# Altium PCB PCB.PcbDoc
Units mil, origin at the board's own origin, x right, y up, seen from the top; angles counter-clockwise.
Board outline 6000 x 4000 mil, 2 copper layers (Top Layer, Bottom Layer); 13 components, 8 nets, 42 pads, 0 vias.
Unrouted connection lines stored in the file: 27.
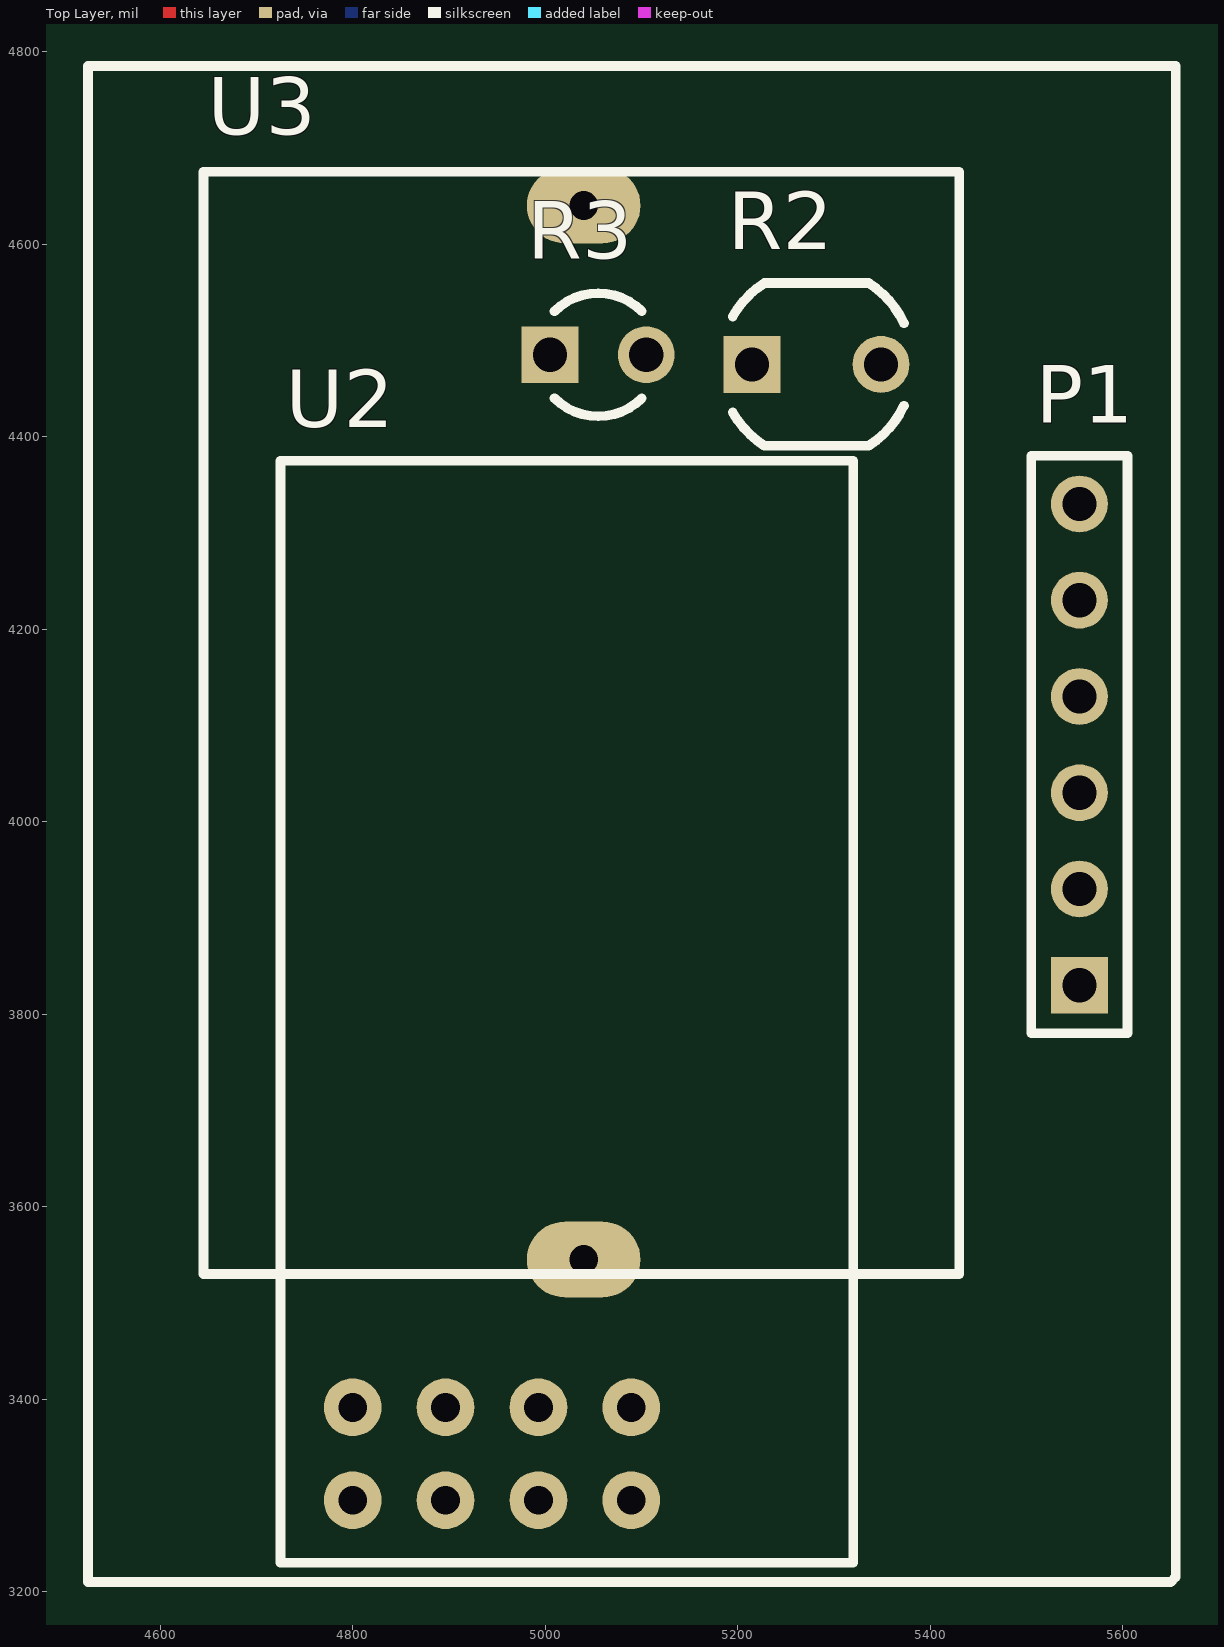
[diagram p0: Top Layer view]
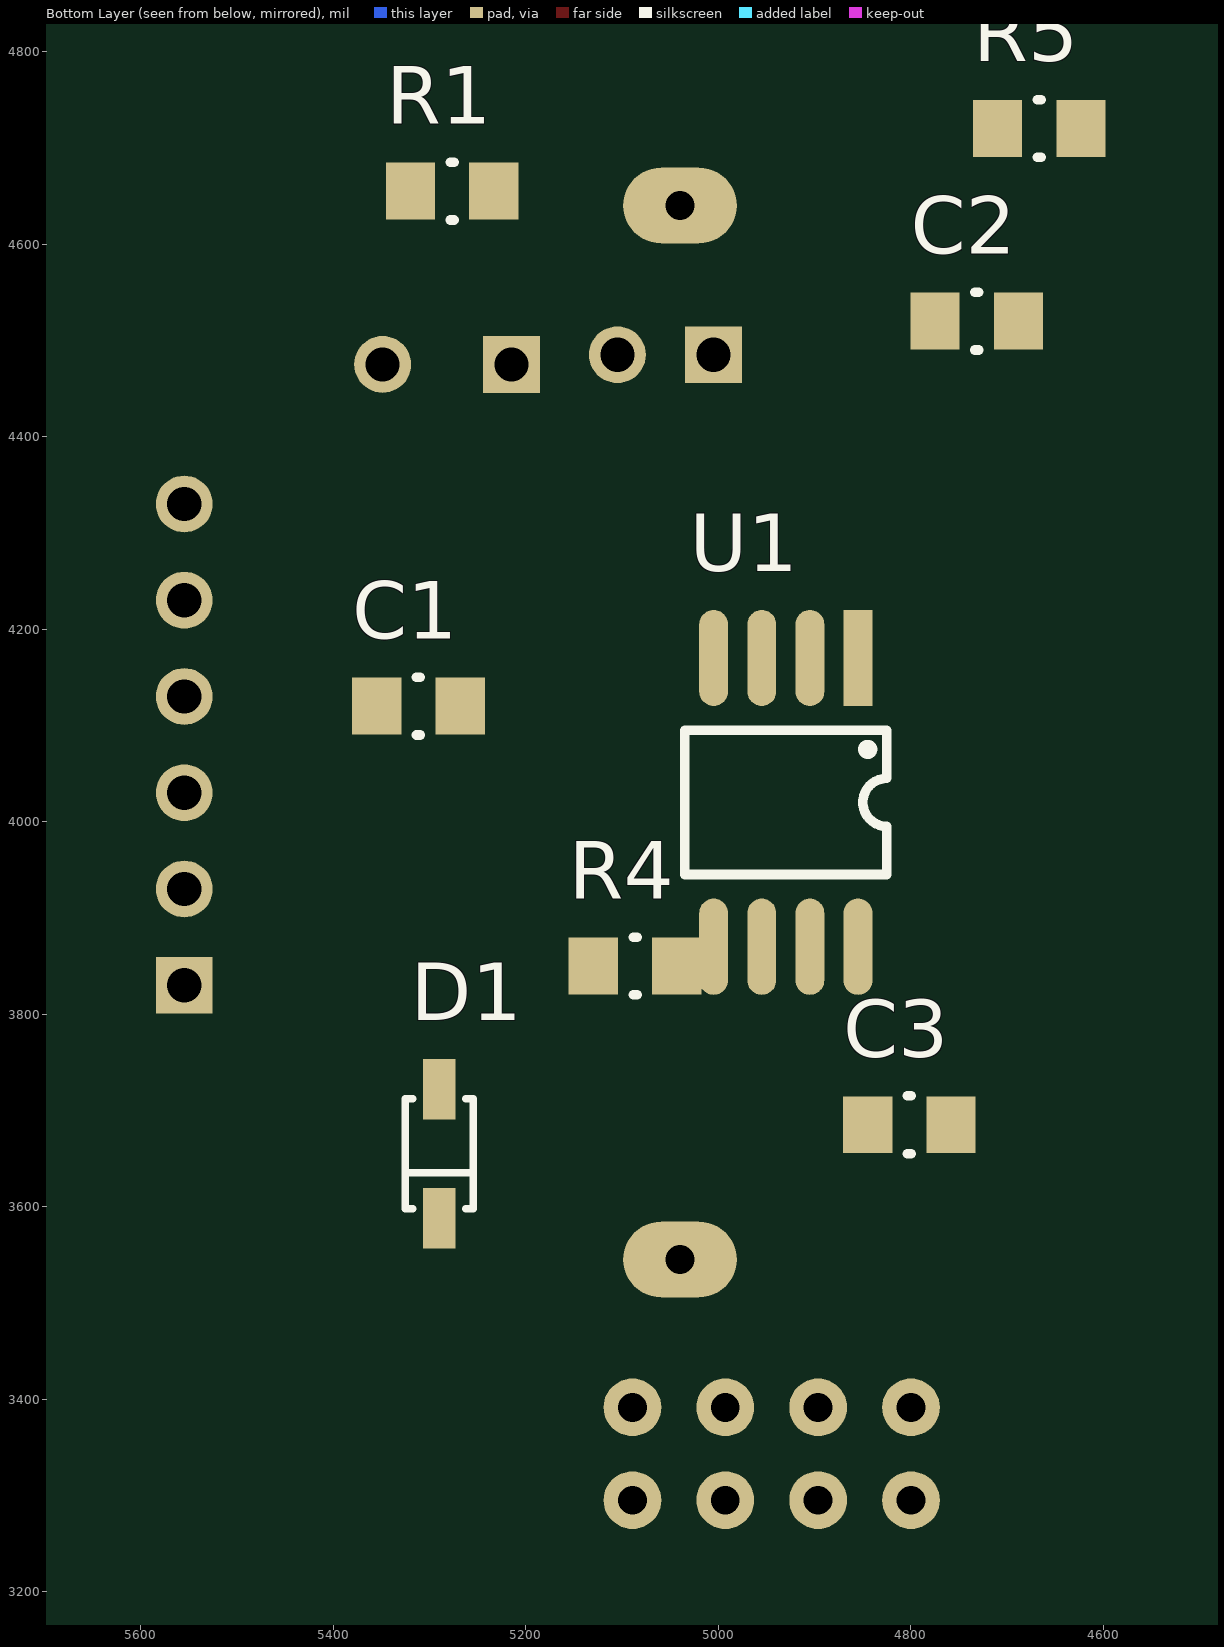
[diagram p1: Bottom Layer view, seen from below]

## Layer stack, top to bottom
Top Solder: solder mask 0.4, Solder Resist, Dk 3.5
Top Layer: signal copper 1.4
Dielectric 1: dielectric 12.6, FR-4, Dk 4.8
Bottom Layer: signal copper 1.4
Bottom Solder: solder mask 0.4, Solder Resist, Dk 3.5

## Board outline
1000,1000 7000,1000 7000,5000 1000,5000

## Design rules (kind name [scope] priority, off if disabled: settings)
Clearance [All] p1: gap=20
DiffPairsRouting [All] p1: maxlimit=15 minlimit=15 mostfreqgap=15 toplayer_minwidth=15 toplayer_maxwidth=15 toplayer_prefwidth=15 bottomlayer_minwidth=15 bottomlayer_maxwidth=15 bottomlayer_prefwidth=15 maxuncoupledlength=500
PasteMaskExpansion [All] p1: expansion=2
PlaneConnect [All] p1: planeconnectstyle=Relief reliefexpansion=20 reliefentries=4 reliefconductorwidth=20 reliefairgap=10
PolygonConnect [All] p1: connectstyle=Relief reliefconductorwidth=15 reliefentries=4 polygonreliefangle="90 Angle" airgapwidth=10
RoomDefinition schematic [InComponentClass('schematic')] p1: confinementstyle=ConfineIn formatcopy=TRUE lockcomponents=FALSE outline 7045,1285 10745,1285 10745,2580 7045,2580
RoutingVias [All] p1: holewidth=28 width=59.06 viastyle="Through Hole" minholewidth=28 minwidth=50 maxholewidth=28 maxwidth=59.06
SolderMaskExpansion [All] p1: expansion=10
Width [All] p1: maxlimit=40 minlimit=15 preferedwidth=25 minimp=50.000000 maximp=50.000000 favimp=50.000000
27 further rules are at their usual default settings.

## Components (designator, comment, footprint, x,y, rotation, side; value= is the part's Value field where it differs from the comment)
C1 "100nF" 0805C 5355,4120 r180 bottom
C2 "100nF" 0805C 4775,4520 r180 bottom
C3 "10nF" 0805C 4845,3685 r180 bottom
D1 "1N4148" 425 5290,3655 r90 bottom
P1 "Pinos" HDR-M-1x6-2.54mm-180-9.2mm 5555,3830 r90 top
R1 "Res" 0805R 5320,4655 r180 bottom
R2 "LDR" LDR-5mm 5215,4475 r0 top
R3 "10k" Thermistor-100mil 5005,4485 r0 top
R4 "Res" 0805R 5130,3850 r180 bottom
R5 "" 0805R 4710,4720 r180 bottom
U1 "ATtiny85-20SH" SOP08-5.3mm(1.27mm) 4855,4170 r0 bottom
U2 "nRF24l01" nRF24l01 4800,3295 r0 top
U3 "CR2032" CR2032 5495,3960 r90 top

## Footprints (in the part's own frame and the unit in brackets; to place one, negate y for a bottom-side part, rotate by r counter-clockwise, add the part's x,y. Pads: shape width x height; smd on the part's side, far side on the other; paste and mask are expansions set on the pad)
425 [mm] "SOD-123; 2 Leads; Body 2.7 x 1.6 mm, (LxW)"
  rect 1.6x0.85 smd: 1(-1.7,0) 2(1.7,0)
  silkscreen extent -1.45,-0.9 1.45,0.9
0805C [mm] "Chip Capacitor; Body 2 x 1.3 mm (LxW typ)"
  rect 1.3x1.5 smd: 1(0,0) 2(2.2,0)
  silkscreen extent 1.05,-0.76 1.15,0.76, body extent 0.1,-0.64 2.1,0.61, height 0.78
0805R [mm] "Chip Resistor; Body 2 x 1.3 mm (LxW typ)"
  rect 1.3x1.5 smd: 1(0,0) 2(2.2,0)
  silkscreen extent 1.05,-0.76 1.15,0.76, body extent 0.1,-0.64 2.1,0.61, height 0.78
CR2032 [mil] "BATT"
  oval 78.74x118.11 hole 30: GND(680,455) VCC(-415,455)
  silkscreen extent -430,65 715,850, body extent -431,61 711,849, height 209
HDR-M-1x6-2.54mm-180-9.2mm [mm] "Male Header, 1 line 6 rows, 180 degrees, 9.2 mm length"
  rect 1.5x1.5 hole 0.9: 1(0,0)
  round 1.5 hole 0.9: 2(2.54,0) 3(5.08,0) 4(7.62,0) 5(10.16,0) 6(12.7,0)
  silkscreen extent -1.27,-1.27 13.97,1.27, body extent -1.17,-1.22 14.07,1.27, height 6.2
LDR-5mm [mm] "Light Dependant Resistor 5 mm; 3D Saeid Jorablo"
  rect 1.5x1.5 hole 0.9: 1(0,0)
  round 1.5 hole 0.9: 2(3.4,0)
  silkscreen extent -0.52,-2.15 4.01,2.15, body extent -0.91,-2.17 4.31,2.13, height 2.24
nRF24l01 [mil]
  round 60 hole 30: CE(96.46,0) CSN(96.46,96.46) GND(0,0) IRQ(289.37,96.46) MISO(289.37,0) MOSI(192.91,96.46) SCK(192.91,0) VCC(0,96.46)
  silkscreen extent -75,-65 520,1080, body extent -70,-60 520,1082, height 138
SOP08-5.3mm(1.27mm) [mil] "Small Outline Package 8 pin"
  rect 30x100 smd: 1(0,0)
  oval 30x100 smd: 2(50,0) 3(100,0) 4(150,0) 5(150,300) 6(100,300) 7(50,300) 8(0,300)
  silkscreen extent -30,75 180,225
Thermistor-100mil [mm] "Thermistor 100 mil"
  rect 1.5x1.5 hole 0.9: 1(0,0)
  round 1.5 hole 0.9: 2(2.54,0)
  silkscreen extent 0.12,-1.63 2.42,1.63, body extent -0.42,-1.5 2.97,1.5, height 8

## Part data
C1 C2 C3: library part Capacitor, "Capacitor"
D1: "Small Signal Diode"
P1: library part Header_1x6, "Header, 1 Line, 6 Columns, 6 Pins"
R1 R4 R5: library part Res1, "Resistor"
R2: "Ligh Dependant Resistor"
R3: library part NTC, "Negative Temperature Coefficient Thermistor"
U1: "Atmel 8-bit AVR Microcontroller with 8 KB In-System Programmable Flash"

## Nets (pads, with @x,y where several pads share a name; then routed paths per layer and width w, separated by ;. In a path a pad name is that pad's centre, name@x,y a point inside that pad or via, vN(x,y) a via of type N, cw(c..) or ccw(c..) an arc to the next point about the centre after c; other vN are vias at no path point)
GND: C1.1 C2.2 C3.2 P1.1 R2.1 R3.2 U1.4 U2.GND U3.GND
NetC3_1: C3.1 R5.1 U2.CSN
NetD1_K: U1.7 U2.SCK
NetR1_1: R1.1 R3.1 U1.2
NetR2_2: R2.2 R4.2 U1.1
NetU1_5: U1.5 U2.MISO
NetU1_6: U1.6 U2.MOSI
VCC: C1.2 C2.1 P1.6 R1.2 R4.1 R5.2 U1.3 U1.8 U2.CE U2.VCC U3.VCC
pads on no net: D1.1 D1.2 P1.2 P1.3 P1.4 P1.5 U2.IRQ

## Silkscreen, mask and mechanical layers (free items; w line width, h text height)
Top Overlay:
  lines w10: 4525,3210 5650,3210 5655,3215 5655,4785 4525,4785 4525,3210